# EAGLE board electric_xmas (EAGLE 6.3)
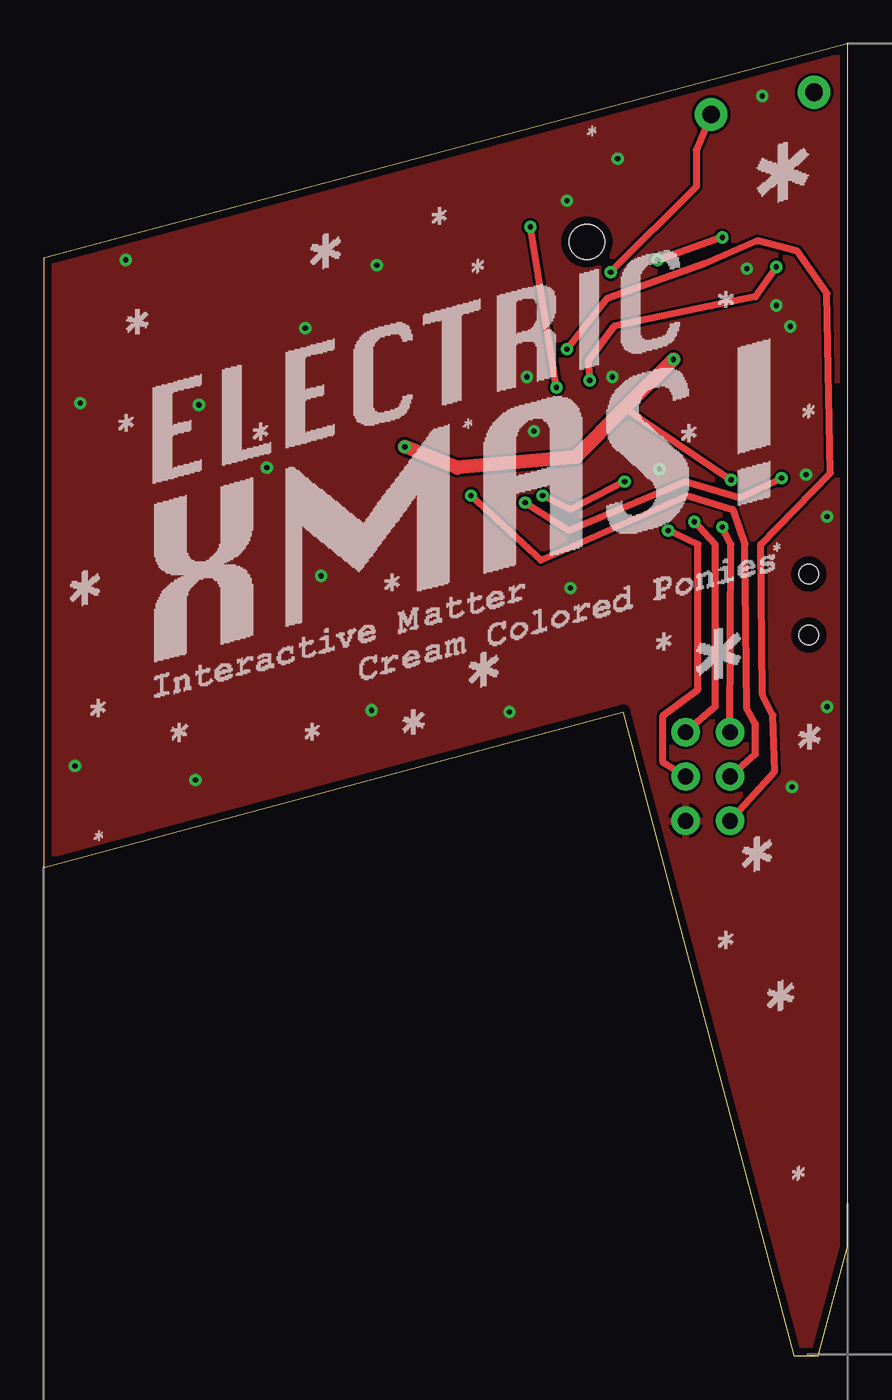
[diagram p0: board, top side]
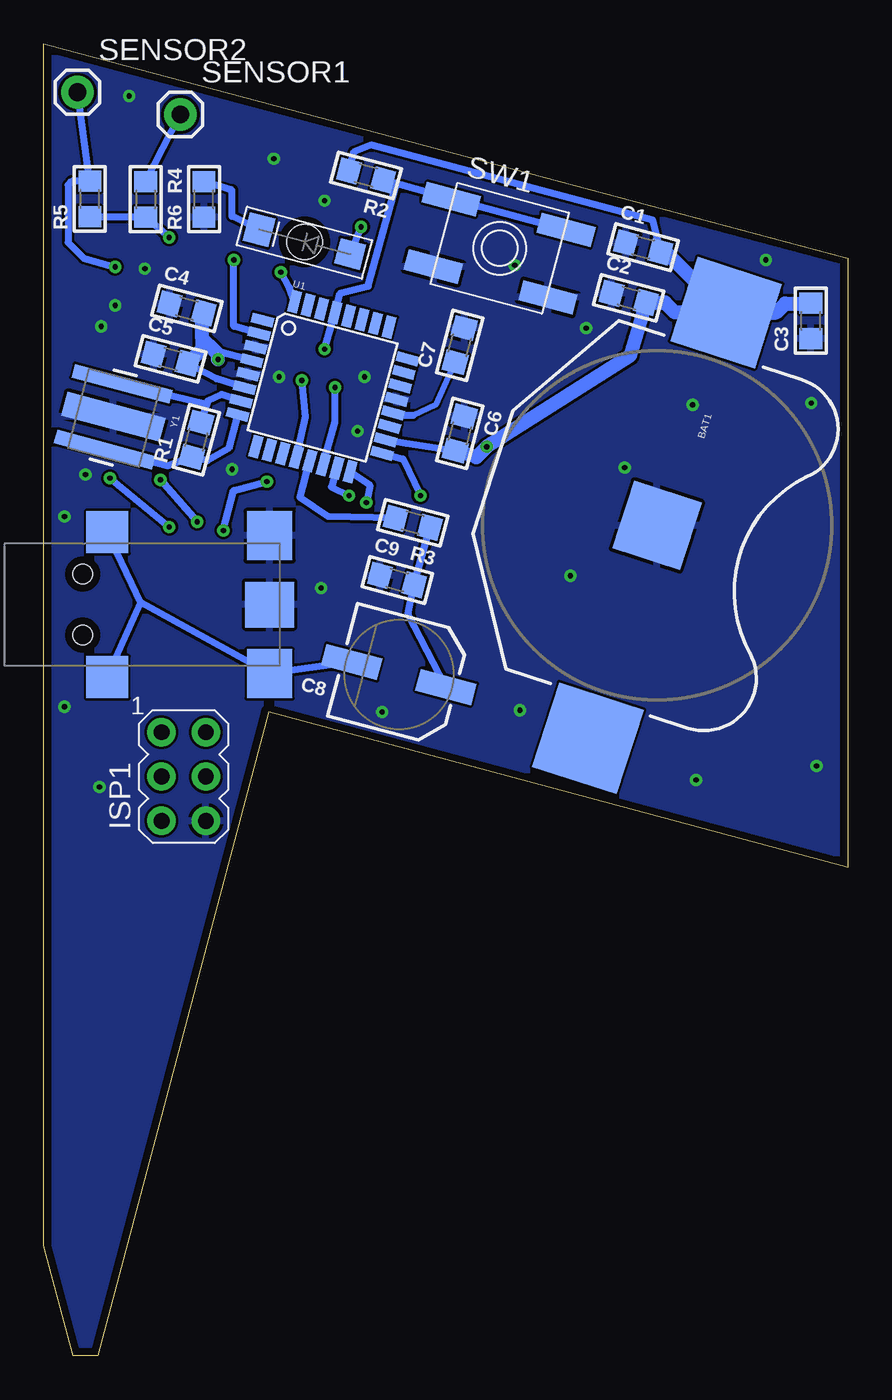
[diagram p1: board, bottom side, seen from below]

Size 46.1 x 75.2 mm. Coordinates in mm from the lower left corner, seen from the top.
Outline: 0,28 33.2,36.9 43,0 44.4,0 46.1,6.3 46.1,75.2 0,62.9 0,28
Copper layers (1*16): Top 0.018mm / dielectric 1.55mm / Bottom 0.018mm
Design rules "eC-STANDARD_pool-2-layer ": minimum track width 0.15mm, minimum drill 0.25mm, track to track 0.15mm, track to pad 0.15mm, pad to pad 0.15mm, via to via 0.15mm, smd to smd 0.15mm, copper to edge 0.45mm, drill to drill 0.3mm, minimum pad ring 0.2mm, minimum via ring 0.2mm, stop-mask expansion 0.1mm, vias tented up to drill 0mil, thermal gap 0.2mm

## Footprints (pad centres in the part's own frame; a part is rotated, then mirrored left to right if it is on the bottom)
BATTCON_20MM = smd 5.08 x 5.08: 1 -12.827,0; 3 12.827,0 | smd 4.064 x 4.064: 2 0,0
C0805 = smd 1.2 x 1.3: 1 -1.016,0; 2 1.016,0
CSV-D = smd 3.302 x 1.27: + -2.794,0; - 2.794,0
AVRISP = drill 0.9 pad 1.626: 1 -1.27,2.54; 2 1.27,2.54; 3 -1.27,0; 4 1.27,0; 5 -1.27,-2.54; 6 1.27,-2.54
LUMEX_GW_BOTTOM = smd 1.5 x 1.5: A 2.7,0 | smd 1.5 x 1.7: C -2.7,0 | hole 2: 0,0
R0805 = smd 1.2 x 1.3: 1 -1.016,0; 2 1.016,0
1X01 = drill 1.016 pad 1.88: 1 0,0
EVQ-Q2 = smd 3.2 x 1.2: A -3.4,-2; A' 3.4,-2; B -3.4,2; B' 3.4,2
TQFP32-08 = smd 1.27 x 0.559: 1 -4.293,2.8; 2 -4.293,2; 3 -4.293,1.2; 4 -4.293,0.4; 5 -4.293,-0.4; 6 -4.293,-1.2; 7 -4.293,-2; 8 -4.293,-2.8; 17 4.293,-2.8; 18 4.293,-2; 19 4.293,-1.2; 20 4.293,-0.4; 21 4.293,0.4; 22 4.293,1.2; 23 4.293,2; 24 4.293,2.8 | smd 0.559 x 1.27: 9 -2.8,-4.293; 10 -2,-4.293; 11 -1.2,-4.293; 12 -0.4,-4.293; 13 0.4,-4.293; 14 1.2,-4.293; 15 2,-4.293; 16 2.8,-4.293; 25 2.8,4.293; 26 2,4.293; 27 1.2,4.293; 28 0.4,4.293; 29 -0.4,4.293; 30 -1.2,4.293; 31 -2,4.293; 32 -2.8,4.293
LUMBERGRC-5325A = smd 2.8 x 2.6: 1 15.2,0 | smd 2.6 x 2.8: 2 15.2,3.95; 3 15.2,-3.95 | smd 2.4 x 2.4: 4@1 5.9,4.15; 4@2 5.9,-4.15 | hole 1.1: 4.5,1.75; 4.5,-1.75
RESONATOR-SMD = smd 0.8 x 5.8: 1 -1.95,0; 3 1.95,0 | smd 1.4 x 5.8: 2 0,0

## Placement (x,y rotation side)
BAT1  [BATTCON_20MM]  10.94,47.59 252 bottom
C1  10µF  [C0805]  11.74,63.53 345 bottom
C2  10µF  [C0805]  12.56,60.63 345 bottom
C3  10µF  [C0805]  2.13,59.32 90 bottom
C4  100nF  [C0805]  37.9,60.03 345 bottom
C5  100nF  [C0805]  38.82,57.13 345 bottom
C6  100nF  [C0805]  22.25,52.86 255 bottom
C7  100nF  [C0805]  22.25,57.92 75 bottom
C8  100µF  [CSV-D]  25.74,39.04 165 bottom
C9  100nF  [C0805]  25.84,44.46 345 bottom
ISP1  AVRISP-6  [AVRISP]  38.07,33.2 0 bottom
LED1  [LUMEX_GW_BOTTOM]  31.14,63.84 345 bottom
R1  1M  [R0805]  37.35,52.5 75 bottom
R2  10k  [R0805]  27.62,67.65 165 bottom
R3  2k2  [R0805]  24.94,47.74 165 bottom
R4  3M3  [R0805]  40.25,66.28 270 bottom
R5  3M3  [R0805]  43.45,66.3 90 bottom
R6  2k2  [R0805]  36.91,66.28 90 bottom
SENSOR1  M01PTH  [1X01]  38.26,71.14 0 bottom
SENSOR2  M01PTH  [1X01]  44.16,72.42 0 bottom
SW1  EVQQ2  [EVQ-Q2]  19.96,63.47 345 bottom
U1  ATMEGA328P  [TQFP32-08]  30.12,55.54 345 bottom
U2  [LUMBERGRC-5325A]  48.35,43.05 0 bottom
U$2  [OUTLINE]  -2,-3.3 0 top  (outside the outline)
U$3  [PRINT]  -2,-3.3 0 top  (outside the outline)
Y1  RESONATORSMD  [RESONATOR-SMD]  42.1,53.82 255 bottom

## Library data of the parts
BAT1 SENSOR1 SENSOR2 U1 = SparkFun
C1-C9 R1-R6 = rc-master-smd
ISP1 SW1 = adafruit
LED1 U2 U$2 U$3 Y1 = ElectricChristmas

## Nets
!RESET: ISP1.5 R2.1 SW1.B SW1.B' U1.29
GND: BAT1.2 C1.1 C2.1 C3.1 C4.1 C5.1 C6.1 C7.2 C9.1 ISP1.6 R6.1 SW1.A SW1.A' U1.3 U1.5 U1.21 U2.1 U2.2 Y1.2
LED: LED1.A U1.14
MISO: ISP1.1 U1.16
MOSI: ISP1.4 U1.15
N$1: R1.2 U1.7 Y1.1
N$2: R1.1 U1.8 Y1.3
N$3: LED1.C R6.2
N$4: C8.- U2.3 U2.4@1 U2.4@2
N$5: C7.1 U1.20
N$6: C8.+ C9.2 R3.1
SCK: ISP1.3 U1.17
SENSOR1: R4.1 SENSOR1.1 U1.32
SENSOR2: R5.2 SENSOR2.1 U1.12
SENSOR_C: R4.2 R5.1 U1.2
SOUND_OUT: R3.2 U1.13
VCC: BAT1.1 C1.2 C2.2 C3.2 C4.2 C5.2 C6.2 ISP1.2 R2.2 U1.4 U1.6 U1.18

## Tracks (layer width: path | path; a pad name or v marks a point on that pad's centre or on a via)
!RESET  (via drill 0.3)
  Top 0.406: ISP1.5 41.9,33.5 41.8,36.7 41.2,37.9 41.1,46.5 45.1,50.6 44.9,60.9 43.2,63.3 40.9,63.9 37.9,62.6 32.3,60.6 v30,57.7
  Bottom 0.406: SW1.B' SW1.B 25.87,67.17 | 25.87,67.17 R2.1 | 25.87,67.17 27.5,61.3 29.1,60.9 U1.29 v30,57.7
GND  (via drill 0.3)
  other vias: 1.8,33.8 19.1,62.5 42.8,59 42,60.2 40.3,62.3 27.7,56.1 32.6,56.1 28.1,53 43.7,50.5 30.2,44 26.7,36.9 18.8,37 15,58.9 8.7,33 44.9,37.2 44.9,48.1 41.2,72.2 32.9,68.6 2.1,54.6 15.9,44.7 8.9,54.5 4.7,62.8 42.9,32.6 35.3,50.8 30,66.2 12.8,50.9
  pour Bottom: -10.7,81.1 54.8,81.1 54.8,-4.9 -10.9,-4.9 -10.9,79.5
  pour Top: -8.6,73.9 53.8,79.6 54.3,-3.9 2.6,7.6 -14.1,34.6
LED  (via drill 0.3)
  Top 0.406: v29.4,55.5 v27.9,64.7
  Bottom 0.406: U1.14 29.4,53.5 v29.4,55.5 | LED1.A v27.9,64.7
MISO  (via drill 0.3)
  Top 0.406: ISP1.1 39.4,46.5 v38.9,47.5 | v27.6,48.9 30.1,47.3 36.8,50.1 39.9,49.2 v42.3,50.3
  Bottom 0.406: U1.16 27.4,49.9 v27.6,48.9 | v42.3,50.3 v38.9,47.5
MOSI  (via drill 0.3)
  Top 0.406: ISP1.4 35.5,34 35.5,36.7 37.5,38.2 37.5,46.5 v35.8,47.3 | v33.3,50.1 30.2,48.5 v28.6,49.3
  Bottom 0.406: U1.15 29.6,49.8 v28.6,49.3 | v35.8,47.3 35.2,49.6 v33.3,50.1
N$1
  Bottom 0.406: U1.7 35.9,55.1 36.7,54.7 36.75,54.56 | 36.75,54.56 R1.2 | Y1.1 36.75,54.56
N$2
  Bottom 0.406: U1.8 35.5,52 36.7,51.3 R1.1 39,51 Y1.3
N$3
  Bottom 0.406: LED1.C 35.3,65.3 35.3,66.8 R6.2
N$4
  Bottom 0.406: C8.- U2.3 40.54,43.17 | 40.54,43.17 40.5,43.1 U2.4@1 | U2.4@2 40.54,43.17
N$5
  Bottom 0.305: 24.9,53.9 23.6,54.5 C7.1
  Bottom 0.406: U1.20 25.74,54.04 25.6,53.9 24.9,53.9
N$6
  Bottom 0.406: C8.+ 25.2,42.5 C9.2 R3.1
SCK  (via drill 0.3)
  Top 0.406: ISP1.3 40.8,34.5 40.8,36.2 40.3,37.1 40.2,46.5 39.5,48.5 36.9,49.3 28.5,45.6 v24.5,49.3
  Bottom 0.406: U1.17 25.5,51.4 v24.5,49.3
SENSOR1  (via drill 0.3)
  Top 0.406: SENSOR1.1 37.4,69.1 37.4,67 v32.5,62.1
  Bottom 0.406: R4.1 SENSOR1.1 | U1.32 32,61.2 v32.5,62.1
SENSOR2  (via drill 0.3)
  Top 0.406: v42,62.4 40.8,60.7 32.7,59 31.2,57 v31.3,55.9
  Bottom 0.406: SENSOR2.1 R5.2 44.48,67.32 44.7,67.1 44.7,63.8 43.8,62.9 v42,62.4 | v31.3,55.9 31.1,53.8 U1.12
SENSOR_C  (via drill 0.3)
  Top 0.406: v38.9,64.1 v35.2,62.8
  Bottom 0.406: R5.1 43.43,65.26 R4.2 v38.9,64.1 | U1.2 35.2,59 v35.2,62.8
SOUND_OUT
  Bottom 0.406: R3.2 29.8,48.1 31.4,49.2 U1.13
VCC  (via drill 0.3)
  Top 0.406: ISP1.2 38.5,37.2 38.5,46.5 v37.3,47.8 | v39.4,50.2 33.3,54.3
  Top 0.813: v36.1,57.1 33.3,54.3 30.5,51.5 23.7,50.9 v20.7,52.1
  Bottom 0.406: U1.18 25.34,52.3 C6.2 | U1.6 36.2,56 C5.2 | U1.4 36.3,57.6 | R2.2 28.3,69 27.3,69.4 11.2,65.1 C1.2 | v37.3,47.8 v39.4,50.2
  Bottom 0.813: BAT1.1 4.11,59.79 3.6,60.3 2.17,60.3 C3.2 | BAT1.1 9.91,59.79 10.49,60.37 C2.2 12.5,57.3 v20.7,52.1 21.3,51.5 C6.2 | v36.1,57.1 36.1,57.4 36.3,57.6 37,58.3 | 37,58.3 37,59.69 C4.2 | 37,58.3 37,57.71 C5.2 | C1.2 10.45,63.27 BAT1.1

## Text on the board
Document: This work is licensed under a / Creative Commons Attribution 3.0 Germany License. | (c) Cream Colored Ponies, Interactive Matter, 2012